# Altium PCB KMT1-42 rev.2.0.0.CPU.PcbDoc
Units mm, origin at the board's own origin, x right, y up, seen from the top; angles counter-clockwise.
Board outline 115 x 130 mm, 2 copper layers (Top Layer, Bottom Layer), stack 1.571 mm thick; 182 components, 138 nets, 1042 pads, 1 vias.
Unrouted connection lines stored in the file: 445.
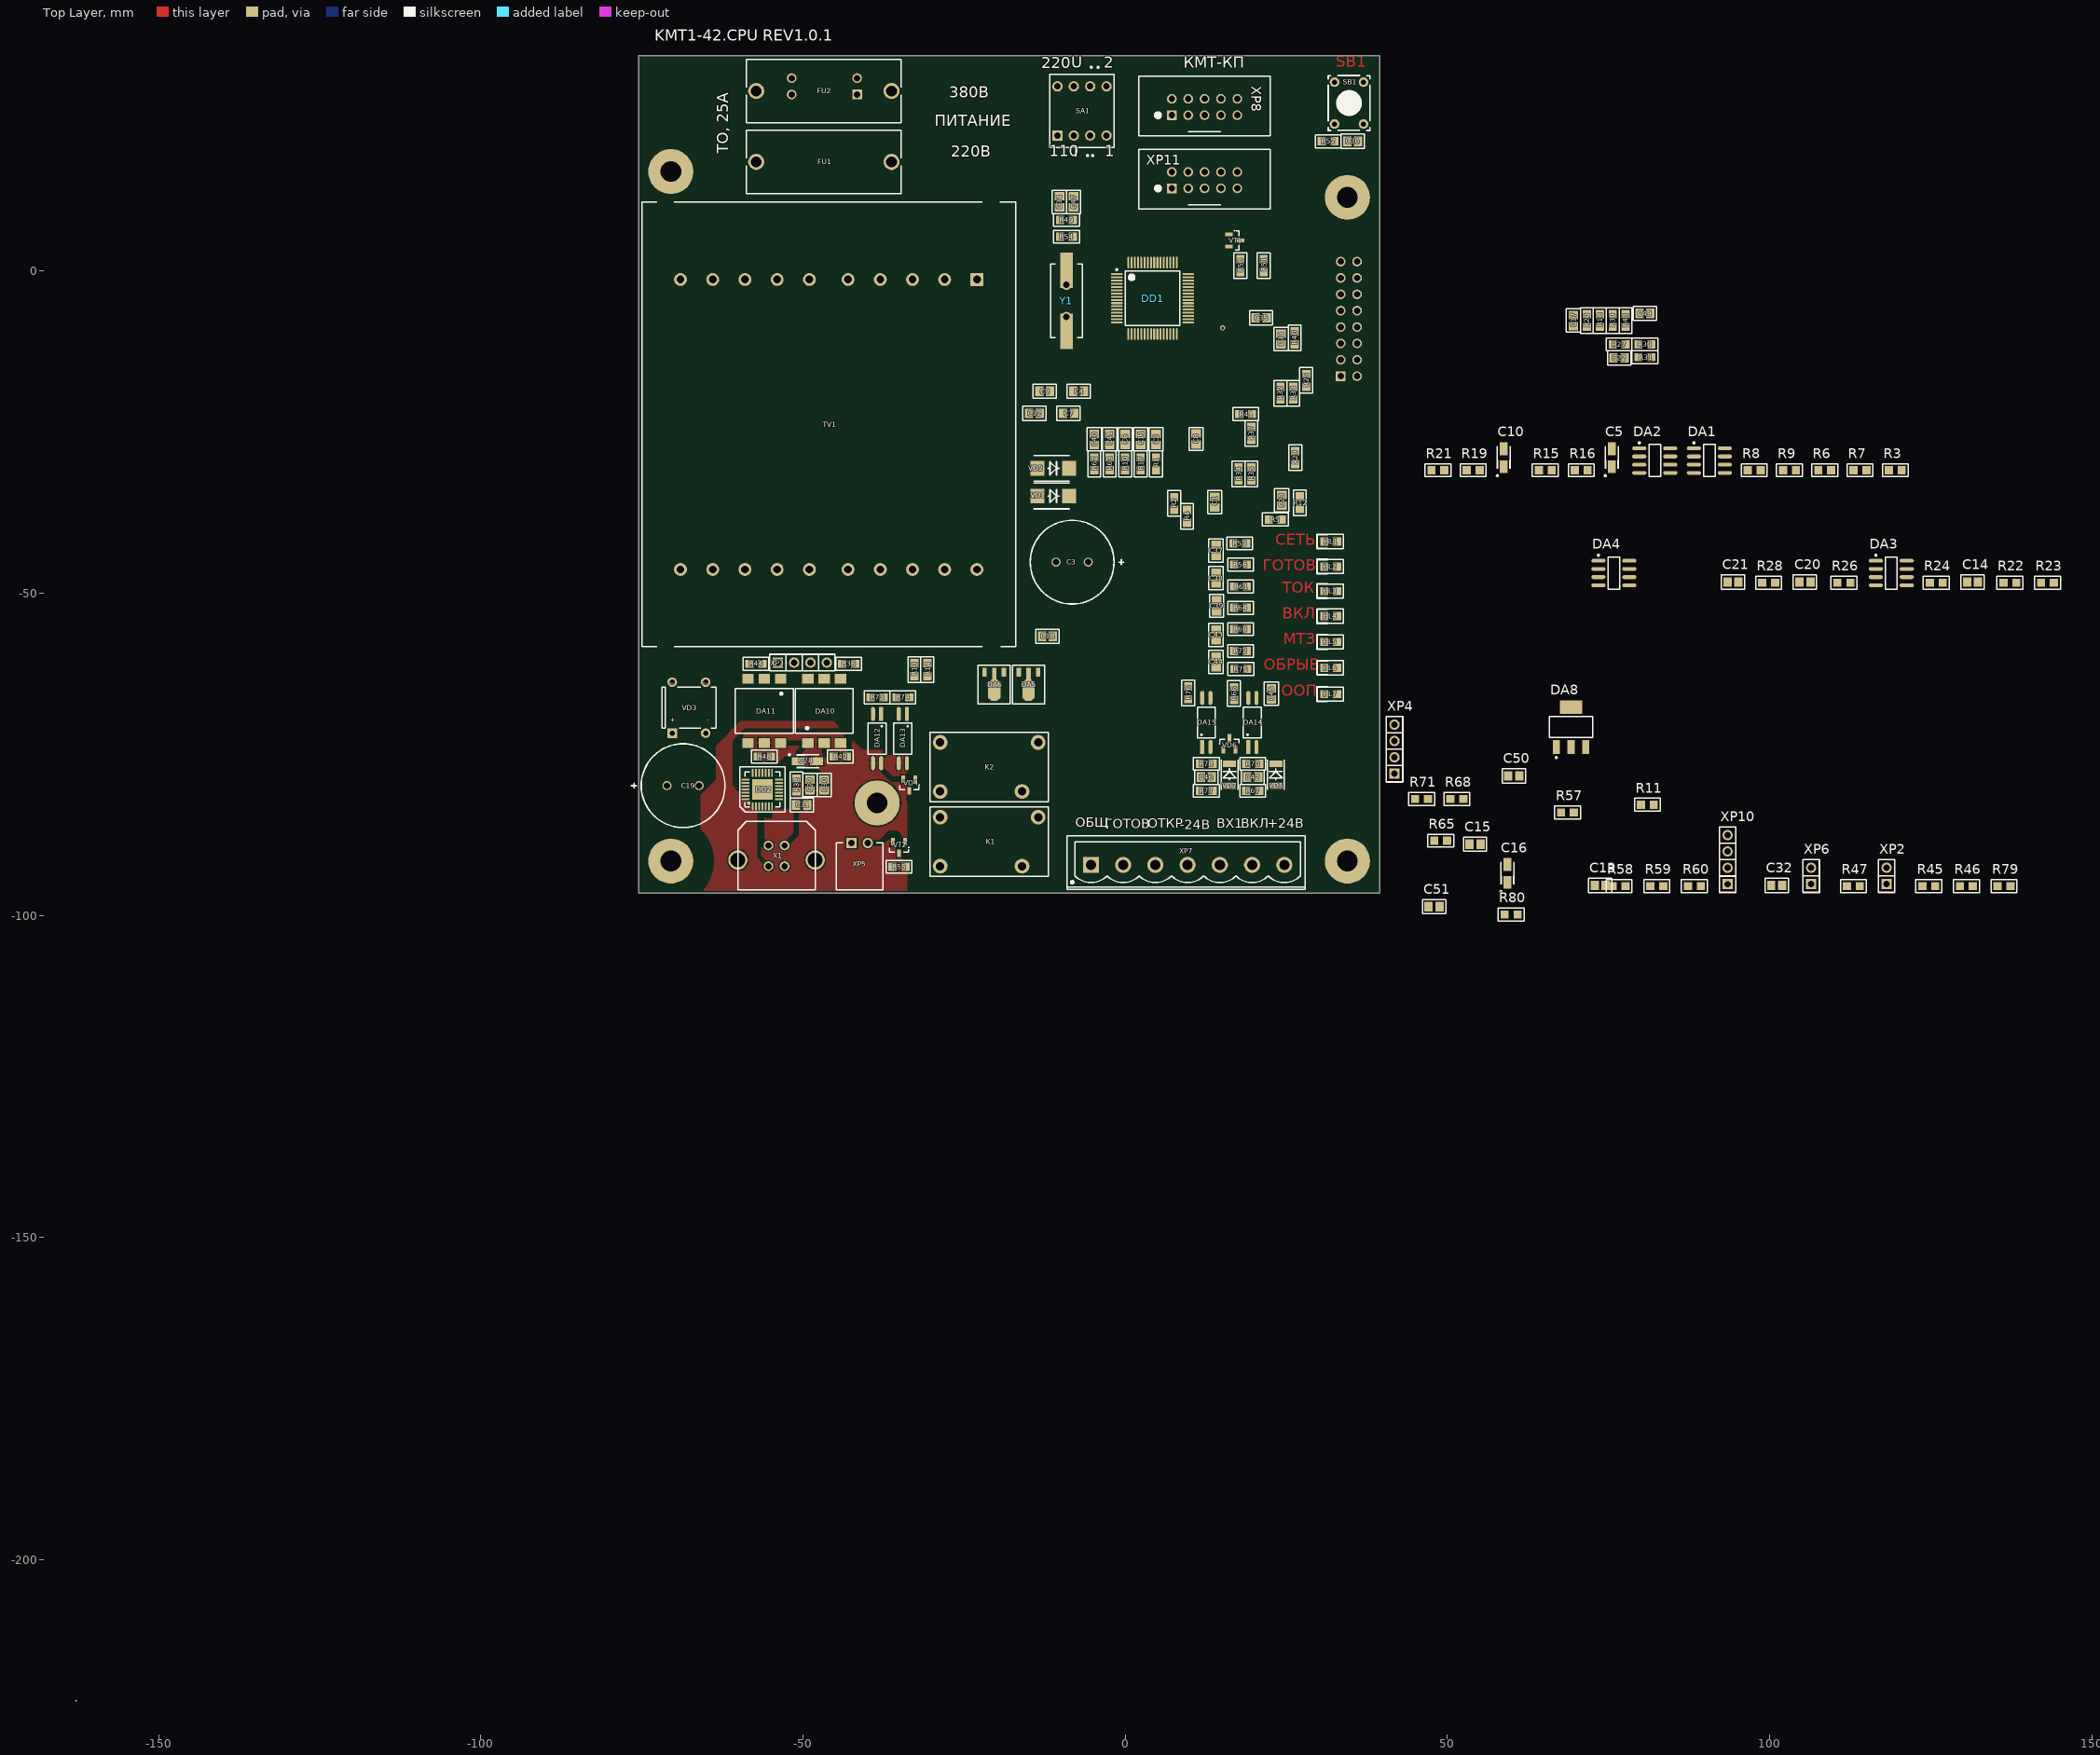
[diagram p0: Top Layer view]
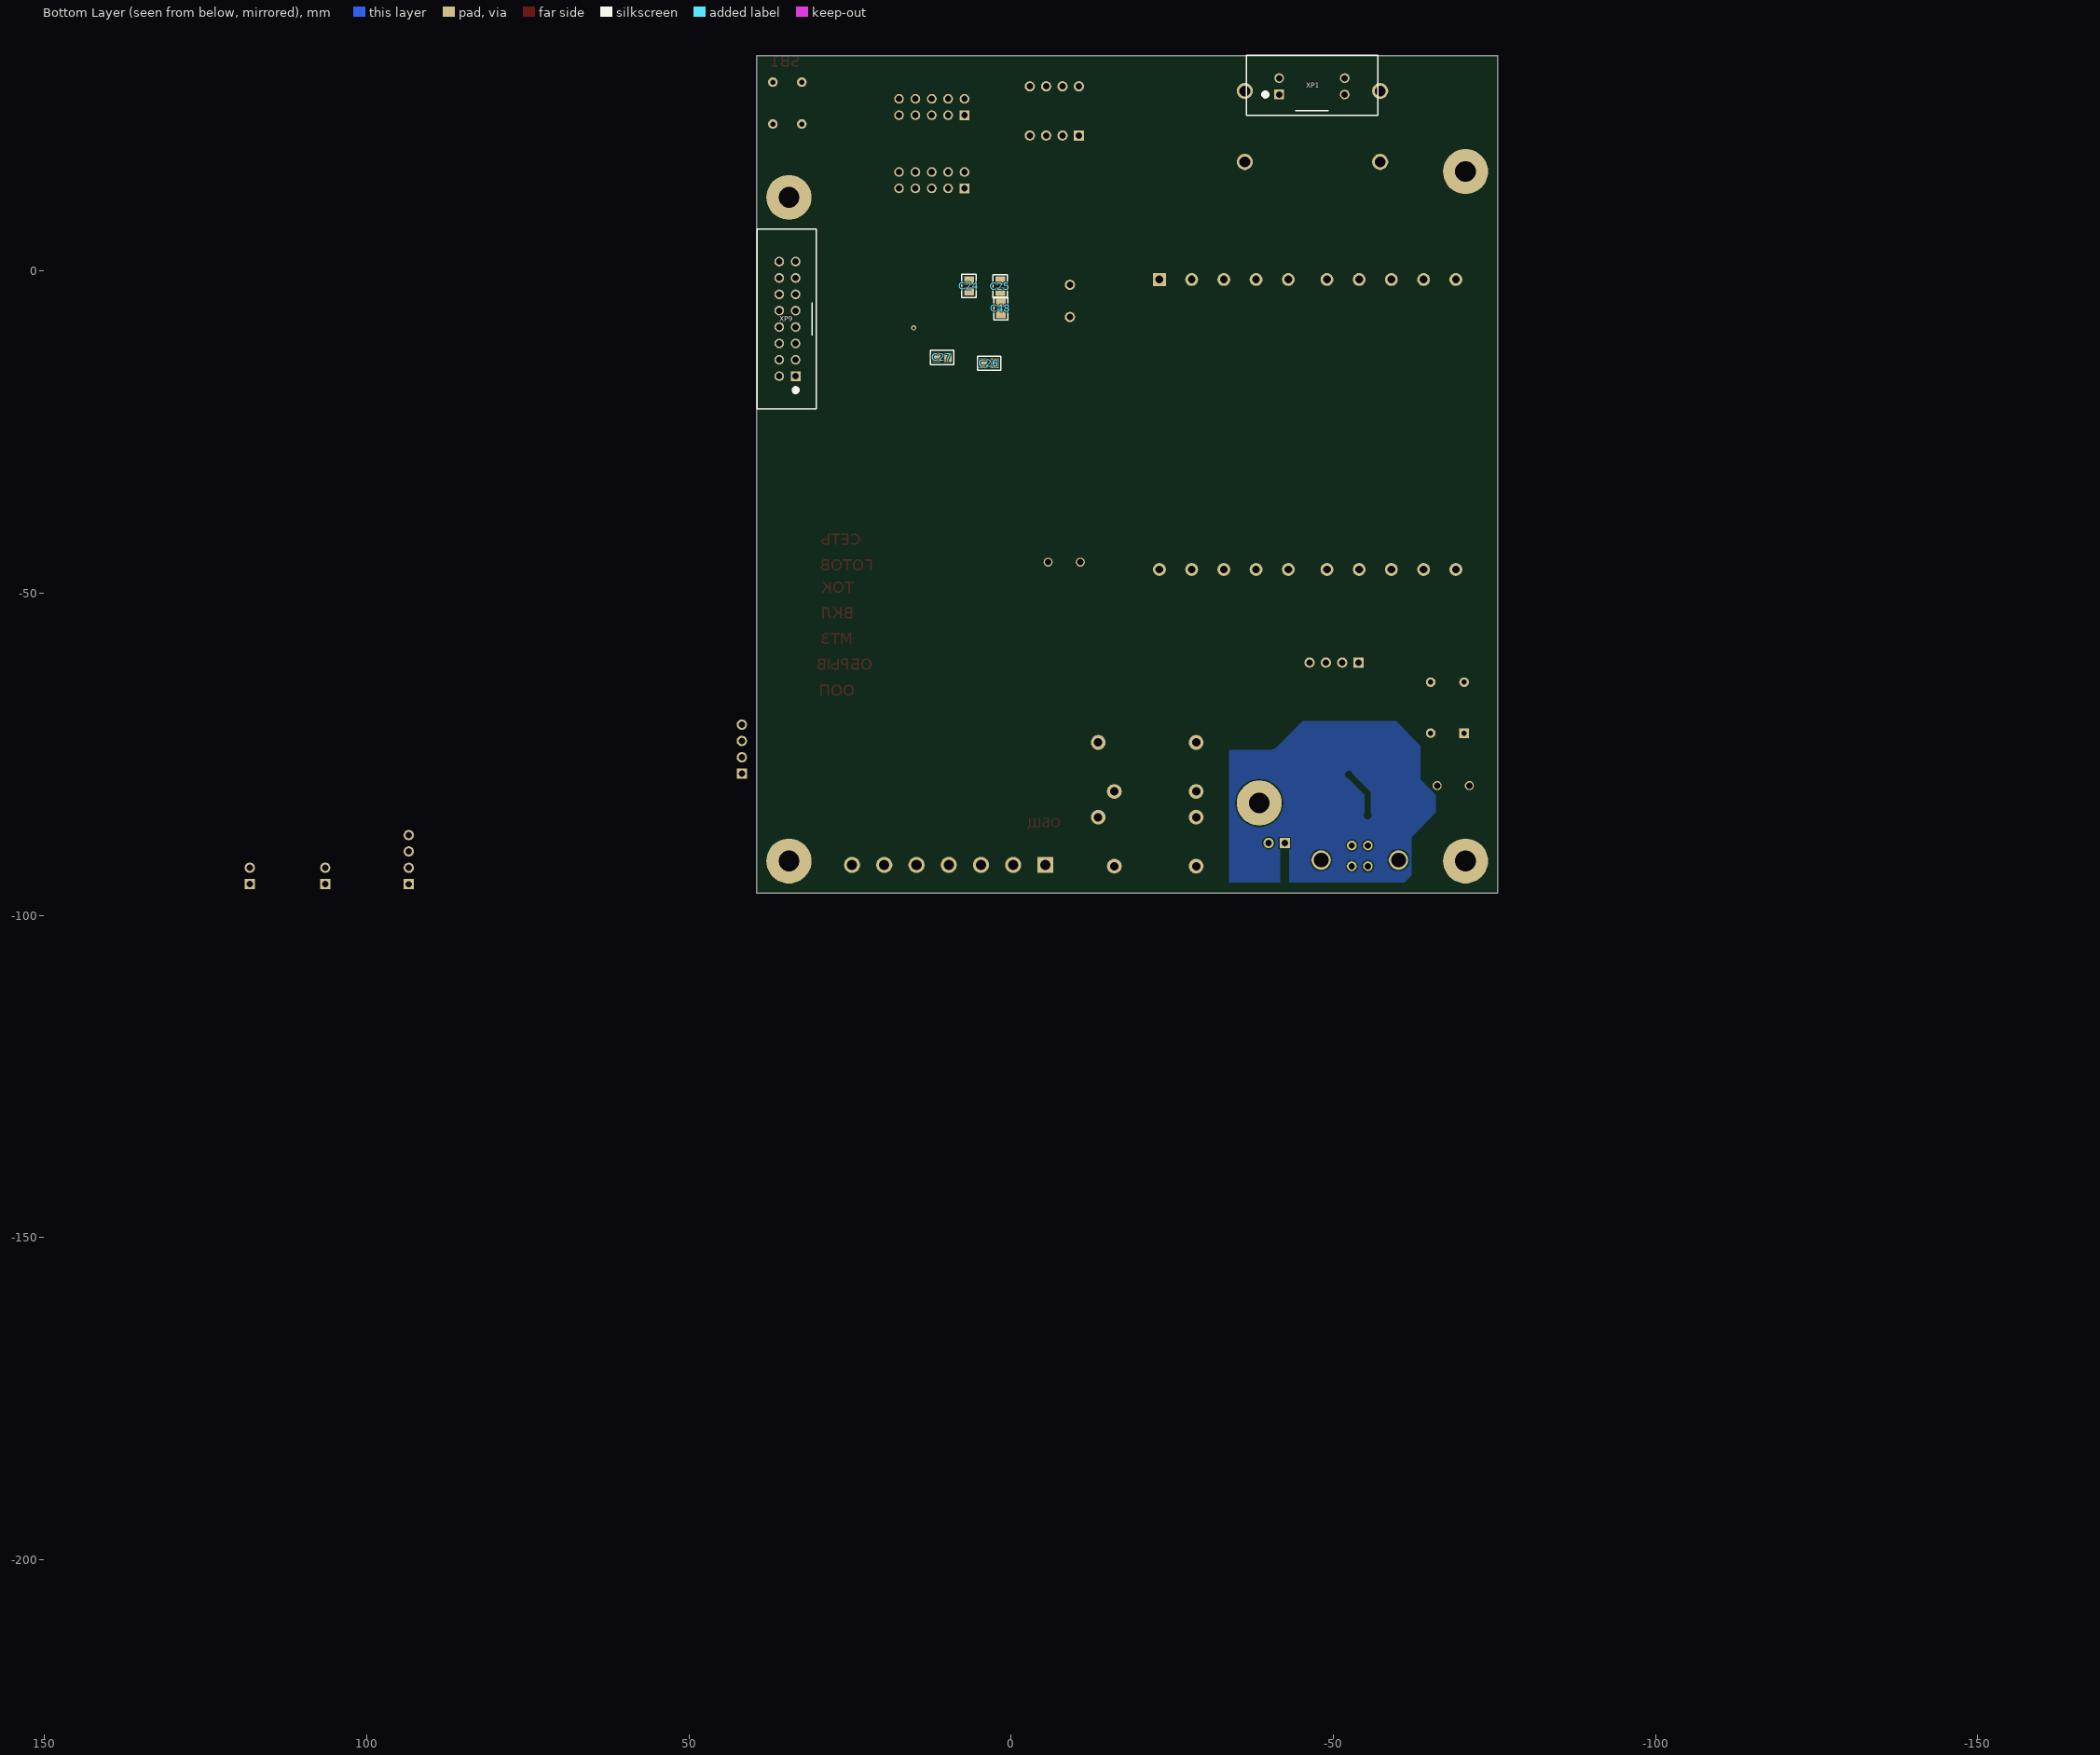
[diagram p1: Bottom Layer view, seen from below]

## Layer stack, top to bottom
Top Solder: solder mask 0.0102, Solder Resist, Dk 3.5
Top Layer: signal copper 0.0356
Dielectric1: core 1.5, FR-4, Dk 4.8
Bottom Layer: signal copper 0.0356
Bottom Solder: solder mask 0.0102, Solder Resist, Dk 3.5

## Board outline
-75.506,-96.582 -75.506,33.418 39.494,33.418 39.494,-96.582

## Design rules (kind name [scope] priority, off if disabled: settings)
Clearance Clearance_KO [OnLayer('Keep-Out Layer')] p1: gap=0.25 ignorepadtopadclearanceinfootprint=FALSE except(0: Arc-Hole Track-Hole SMDPad-Hole THPad-Hole Via-Hole Fill-Hole Poly-Hole Region-Hole Text-Hole)
Clearance Clearance_NPTH [(HoleDiameter > 0) And (PadIsPlated = 'False')] p2: gap=0.3 ignorepadtopadclearanceinfootprint=FALSE except(0: Arc-Hole Track-Hole SMDPad-Hole THPad-Hole Via-Hole Fill-Hole Poly-Hole Region-Hole Text-Hole)
Clearance [All] p3: gap=0.2 ignorepadtopadclearanceinfootprint=FALSE
Height [All] p1: minheight=0 maxheight=2500.4 prefheight=12.7
HoleSize [All] p1: absolutevalues=TRUE maxlimit=4.5 minlimit=0.4 maxpercent=80.000 minpercent=20.000
HoleToHoleClearance [All] p1: gap=0.25 allowstackedmicrovias=TRUE
MinimumSolderMaskSliver [All] p1: minsoldermaskwidth=0.1
PlaneClearance [All] p1: clearance=0.5
PlaneConnect [All] p1: planeconnectstyle=Relief reliefexpansion=0.5 reliefentries=4 reliefconductorwidth=0.2 reliefairgap=0.2
PolygonConnect PolygonConnect_via [IsVia] p1: connectstyle=Direct reliefconductorwidth=0.254 reliefentries=4 polygonreliefangle="90 Angle" airgapwidth=0.254
PolygonConnect [All] p2: connectstyle=Relief reliefconductorwidth=0.3 reliefentries=4 polygonreliefangle="90 Angle" airgapwidth=0.2
RoutingCorners [All] p1: cornerstyle=45-Degree minsetback=2.5 maxsetback=2.5
RoutingVias [All] p1: holewidth=0.4 width=0.8 viastyle="Through Hole" minholewidth=0.4 minwidth=0.8 maxholewidth=10 maxwidth=10
SilkToSolderMaskClearance SilkscreenOverComponentPads [IsPad] p1: minsilkscreentomaskgap=0.254 clearancetoexposedcopper=TRUE
SolderMaskExpansion SolderMaskExpansion_via [isvia] p1: expansion=-1 istentingtop=FALSE
SolderMaskExpansion [All] p2: expansion=0.1 istentingtop=FALSE
SupplyNets "Schematic Supply Nets" [InNet('GND')] p1: voltage=0.000
Width [All] p1: maxlimit=50 minlimit=0.2 preferedwidth=0.2
22 further rules are at their usual default settings.

## Components (designator, comment, footprint, x,y, rotation, side; value= is the part's Value field where it differs from the comment)
C1 "0.1uF" cap0805 13.894,-35.882 r270 top
C2 "0.01uF" cap0805 4.798,-26.144 r270 top
C3 "2200uF" "ECR-EHR 13mm" -8.23,-45.202 r180 top
C4 "0.1uF" cap0805 -7.205,-18.686 r0 top
C5 "*6.8uF" TC3216-1206-A 75.513,-28.984 r90 top
C6 "0.01uF" cap0805 -0.002,-26.144 r270 top
C7 "0.47uF" cap0805 -8.782,-22.102 r180 top
C8 "1000pF" cap0805 10.994,-26.082 r90 top
C9 "0.1uF" cap0805 -12.505,-18.686 r0 top
C10 "*6.8uF" TC3216-1206-A 58.762,-28.984 r90 top
C11 "1000pF" cap0805 2.398,-26.144 r270 top
C12 "0.47uF" cap0805 -14.083,-22.102 r180 top
C13 "0.1uF" cap0805 73.72,-95.363 r0 top
C14 "0.47uF" cap0805 131.517,-48.284 r0 top
C15 "0.1uF" cap0805 54.289,-88.987 r0 top
C16 "*6.8uF" TC3216-1206-A 59.319,-93.508 r90 top
C17 "1000pF" cap0805 69.559,-7.7 r270 top
C18 "2.2uF" cap0805 -12.065,-56.696 r180 top
C19 "1000uF" "ECR-EHR 13mm" -68.606,-79.882 r0 top
C20 "1000pF" cap0805 105.491,-48.284 r0 top
C21 "2.2uF" cap0805 94.316,-48.284 r0 top
C22 "1000pF" cap0805 76.659,-13.5 r0 top
C23 "0.1uF" cap0805 24.294,-35.582 r270 top
C24 "0.1uF" cap0805 6.548,-2.311 r90 bottom
C25 "0.1uF" cap0805 1.702,-2.376 r90 bottom
C26 "0.1uF" cap0805 3.437,-14.331 r0 bottom
C27 "0.1uF" cap0805 10.7,-13.422 r0 bottom
C28 "6.8uF" TC3216-1206-A -49.306,-76.082 r0 top
C29 "1uF" cap0805 -48.906,-79.782 r90 top
C30 "0.1uF" cap0805 -46.706,-79.782 r90 top
C31 "0.1uF" cap0805 -50.206,-82.882 r180 top
C32 "1000pF" cap0805 101.107,-95.375 r0 top
C33 "1000pF" cap0805 24.194,-10.582 r270 top
C34 "0.1uF" cap0805 -10.206,10.718 r270 top
C35 "1000pF" cap0805 21.094,-7.282 r180 top
C36 "0.1uF" cap0805 35.294,20.118 r180 top
C37 "0.01uF" cap0805 14.094,-43.382 r90 top
C38 "0.01uF" cap0805 14.094,-47.682 r270 top
C39 "0.1uF" cap0805 14.194,-51.982 r270 top
C40 "1000pF" cap0805 -4.802,-26.144 r270 top
C41 "1000pF" cap0805 -2.402,-26.144 r270 top
C42 "0.1uF" cap0805 19.794,-78.582 r180 top
C43 "0.01uF" cap0805 14.094,-56.482 r270 top
C44 "0.01uF" cap0805 14.094,-60.682 r270 top
C45 "0.01uF" cap0805 22.694,-65.632 r270 top
C46 "0.1uF" cap0805 12.594,-78.582 r180 top
C47 "0.1uF" cap0805 -8.006,10.718 r270 top
C48 "0.1uF" cap0805 1.596,-5.828 r270 bottom
C49 "1000pF" cap0805 80.659,-6.6 r180 top
C50 "20pF" cap0805 60.309,-78.37 r0 top
C51 "20pF" cap0805 47.939,-98.665 r0 top
DA1 "AD8602ARZ" SO-8 90.663,-29.434 r0 top
DA2 "AD8602ARZ" SO-8 82.188,-29.434 r0 top
DA3 "AD8602ARZ" SO-8 118.892,-46.884 r0 top
DA4 "AD8602ARZ" SO-8 75.84,-46.884 r0 top
DA5 "L78L05ACUTR" SOT89 -15.017,-63.684 r180 top
DA6 "L78L33ACUTR" SOT89 -20.317,-63.684 r180 top
DA8 "LM1117MP-3.3" SOT223 69.199,-70.801 r0 top
DA10 "H11L1SR2M" PDIP6 -46.706,-68.282 r0 top
DA11 "H11L1SR2M" PDIP6 -56.006,-68.282 r180 top
DA12 "PS2801-1" SOP4 -38.506,-72.582 r180 top
DA13 "PS2801-1" SOP4 -34.506,-72.582 r180 top
DA14 "PS2801-1" SOP4 19.74,-70.082 r0 top
DA15 "PS2801-1" SOP4 12.594,-70.082 r0 top
DD1 "STM32F405RGT6" LQFP64 4.25,-4.25 r0 top
DD2 "CP2103" QFN-28 -56.306,-80.482 r0 top locked
FU1 "FH101" FH101 -46.758,16.918 r0 top locked
FU2 "FH101" FH101 -46.758,27.918 r0 top locked
HL1 "KP-2012SGC" Led0805 31.894,-41.982 r180 top
HL2 "KP-2012SGC" Led0805 31.894,-45.882 r180 top
HL3 "KP-2012SYC" Led0805 31.894,-49.682 r180 top
HL4 "KP-2012SYC" Led0805 31.894,-53.582 r180 top
HL5 "KP-2012SRC" Led0805 31.894,-57.582 r180 top
HL6 "KP-2012SRC" Led0805 31.894,-61.582 r180 top
HL7 "KP-2012SRC" Led0805 31.894,-65.682 r180 top
K1 "TRC-24VDC-SC-AD" TRC-24VDC-SC-AD -28.706,-84.782 r0 top
K2 "TRC-24VDC-SC-AD" TRC-24VDC-SC-AD -28.706,-73.182 r0 top
R1 "820" res0805 4.798,-29.944 r90 top
R2 "33k" res0805 7.594,-36.082 r90 top
R3 "33k" res0805 119.515,-30.934 r0 top
R4 "4.7k" res0805 9.594,-38.082 r90 top
R5 "33k" res0805 23.294,-38.582 r0 top
R6 "20k" res0805 108.564,-30.934 r0 top
R7 "20k" res0805 114.039,-30.934 r0 top
R8 "33k" res0805 97.614,-30.934 r0 top
R9 "33k" res0805 103.089,-30.934 r0 top
R10 "820" res0805 -0.002,-29.944 r90 top
R11 "33k" res0805 81.036,-82.84 r0 top
R12 "20k" res0805 27.094,-35.982 r90 top
R13 "20k" res0805 -32.706,-61.882 r90 top
R14 "4.7k" res0805 -30.706,-61.882 r90 top
R15 "*" res0805 65.187,-30.934 r0 top
R16 "*" res0805 70.762,-30.934 r0 top
R17 "150" res0805 2.398,-29.944 r90 top
R18 "1k" res0805 73.659,-7.7 r90 top
R19 "33k" res0805 54.012,-30.934 r0 top
R20 "150" res0805 71.659,-7.7 r270 top
R21 "4.7k" res0805 48.536,-30.934 r0 top
R22 "33k" res0805 137.293,-48.384 r0 top
R23 "20k" res0805 143.143,-48.384 r0 top
R24 "33k" res0805 125.867,-48.384 r0 top
R25 "10k" res0805 28.094,-16.982 r90 top
R26 "20k" res0805 111.541,-48.384 r0 top
R27 "1k" res0805 76.659,-11.4 r180 top
R28 "4.7k" res0805 99.866,-48.384 r0 top
R29 "*" res0805 26.394,-28.982 r270 top
R30 "150" res0805 80.659,-11.4 r180 top
R31 "150" res0805 80.659,-13.4 r180 top
R32 "33k" res0805 24.094,-18.982 r90 top
R33 "4.7k" res0805 26.094,-18.982 r90 top
R34 "33k" res0805 17.587,-31.509 r270 top
R35 "20k" res0805 19.587,-31.509 r90 top
R36 "300" res0805 -42.906,-60.982 r180 top
R37 "33k" res0805 19.587,-25.209 r270 top
R38 "4.7k" res0805 -51.006,-79.782 r90 top
R39 "1k" res0805 75.659,-7.7 r90 top
R40 "10k" res0805 26.294,-10.382 r270 top
R41 "20k" res0805 18.687,-22.209 r180 top
R42 "470" res0805 -44.206,-75.382 r180 top
R43 "150" res0805 77.659,-7.7 r270 top
R44 "300" res0805 -57.306,-60.982 r180 top
R45 "*" res0805 124.708,-95.475 r0 top
R46 "*" res0805 130.558,-95.475 r0 top
R47 "4.7k" res0805 113.007,-95.475 r0 top
R48 "470" res0805 -56.006,-75.382 r0 top
R49 "10k" res0805 -9.106,7.918 r0 top
R50 "1k" res0805 17.894,0.818 r90 top
R51 "150" res0805 21.494,0.818 r90 top
R52 "2k" res0805 31.494,20.118 r180 top
R53 "1k" res0805 17.794,-42.282 r180 top
R54 "10k" res0805 -9.106,5.318 r180 top
R55 "10k" res0805 -35.106,-92.482 r0 top
R56 "1k" res0805 17.894,-45.582 r180 top
R57 "10" res0805 68.646,-84.045 r0 top
R58 "4.7k" res0805 76.656,-95.475 r0 top
R59 "4.7k" res0805 82.506,-95.475 r0 top
R60 "4.7k" res0805 88.331,-95.475 r0 top
R61 "1k" res0805 17.894,-48.982 r180 top
R62 "150" res0805 -4.802,-29.944 r90 top
R63 "150" res0805 -2.402,-29.944 r90 top
R64 "1k" res0805 17.894,-52.282 r180 top
R65 "100" res0805 48.973,-88.44 r0 top
R66 "2k" res0805 16.885,-65.582 r270 top
R67 "1k" res0805 19.794,-80.682 r0 top
R68 "100" res0805 51.478,-81.963 r0 top
R69 "1k" res0805 17.894,-55.582 r180 top
R70 "1k" res0805 19.794,-76.482 r180 top
R71 "100" res0805 46.003,-81.963 r0 top
R72 "1k" res0805 17.894,-58.982 r180 top
R73 "470" res0805 -38.506,-66.182 r180 top
R74 "470" res0805 -34.506,-66.182 r180 top
R75 "1k" res0805 17.948,-61.782 r180 top
R76 "2k" res0805 9.794,-65.482 r270 top
R77 "1k" res0805 12.594,-80.682 r0 top
R78 "1k" res0805 12.594,-76.482 r180 top
R79 "1k" res0805 136.384,-95.475 r0 top
R80 "1M" res0805 59.903,-99.884 r0 top
SA1 "SWD1-4" SWD1-4 -10.506,21.018 r0 top locked
SB1 "SWT-6" SWT-6 34.794,26.018 r270 top locked
TV1 "ТПГ18" TPG18 -46.006,-23.832 r180 top locked
VD1 "10BQ060" SMB -11.162,-34.937 r0 top
VD2 "10BQ060" SMB -11.162,-30.637 r0 top
VD3 "DF01M" DF-M -67.706,-67.782 r180 top
VD4 "BAV70" SOT23 -33.506,-79.782 r270 top
VD5 "TZMC10" SOD80 23.394,-78.182 r90 top
VD6 "BAV70" SOT23 16.194,-73.382 r90 top
VD7 "TZMC10" SOD80 16.194,-78.182 r90 top
VT1 "IRLML2803TR" SOT23 16.994,4.718 r0 top
VT2 "IRLML2803TR" SOT23 -35.106,-89.482 r270 top
X1 "M701-330442" USB_Bvert -54.106,-90.782 r0 top locked
XP1 "IDC-10" IDC-10#1 -46.676,28.648 r180 bottom locked
XP2 "PLS-2" PLS2 118.158,-93.9 r0 top
XP3 "PLS-4" PLS4 -50.106,-60.782 r270 top
XP4 "PLS-4" PLS4 41.802,-74.222 r0 top
XP5 "CWF-2R" CWF-2R -41.206,-88.782 r0 top locked
XP6 "PLS-2" PLS2 106.457,-93.9 r0 top
XP7 "2EDGVC-5-07P" 2EDGVC-5.0-7P-2 12.194,-92.182 r0 top locked
XP8 "IDC-10" IDC-10#2 12.324,25.438 r0 top locked
XP9 "IDC-16" IDC-16 34.724,-7.442 r90 bottom locked
XP10 "PLS-4" PLS4 93.481,-91.375 r0 top
XP11 "IDC-10" IDC-10#2 12.324,14.085 r0 top
Y1 "8 MHz" XT49M -9.109,-4.659 r90 top

## Footprints (in the part's own frame and the unit in brackets; to place one, negate y for a bottom-side part, rotate by r counter-clockwise, add the part's x,y. Pads: shape width x height; smd on the part's side, far side on the other; paste and mask are expansions set on the pad)
2EDGVC-5.0-7P-2 [mm]
  rect 2.5x2.5 hole 1.6: 1(-17.5,0)
  round 2.5 hole 1.6: 2(-12.5,0) 3(-7.5,0) 4(-2.5,0) 5(2.5,0) 6(7.5,0) 7(12.5,0)
  silkscreen extent -21.25,-3.8 15.75,4.5, body extent -21.25,-3.78 15.75,12.08, height 22.31
cap0805 [mm]
  rect 1.3x1.5 smd: 1(-0.85,0) 2(0.85,0)
  silkscreen extent -1.8,-1.1 1.8,1.1, body extent -1,-0.62 1,0.62, height 0.61
CWF-2R [mm]
  rect 1.6x1.6 hole 1: 1(-1.25,0)
  round 1.6 hole 1: 2(1.25,0)
  silkscreen extent -3.6,-7.3 3.6,0, body extent -3.7,-7.3 3.7,0.34, height 5.75
DF-M [mm]
  rect 1.5x1.5 hole 0.8: 1(2.6,3.95)
  round 1.5 hole 0.8: 2(-2.6,3.95) 3(-2.6,-3.95) 4(2.6,-3.95)
  silkscreen extent -4.2,-3.2 4.2,3.2, body extent -4.26,-4 4.26,4, height 4.09
"ECR-EHR 13mm" [mm]
  round 1.4 hole 1: 1(-2.5,0) 2(2.5,0)
  silkscreen extent -8,-6.5 6.5,6.5
FH101 [mm]
  round 2.5 hole 1.7: 1(-10.5,0) 2(10.5,0)
  silkscreen extent -12,-4.9 12,4.9, body extent -13.25,-4.9 13.25,4.9, height 13.41
IDC-10#1 [mm]
  rect 1.5x1.5 hole 1: 1(-5.08,-1.27)
  round 1.5 hole 1: 2(-5.08,1.27) 9(5.08,-1.27) 10(5.08,1.27)
  silkscreen extent -10.2,-4.5 10.2,4.8, body extent -10.2,-4.45 10.2,4.9, height 9.35
IDC-10#2 [mm]
  rect 1.5x1.5 hole 1: 1(-5.08,-1.27)
  round 1.5 hole 1: 2(-5.08,1.27) 3(-2.54,-1.27) 4(-2.54,1.27) 5(0,-1.27) 6(0,1.27) 7(2.54,-1.27) 8(2.54,1.27) 9(5.08,-1.27) 10(5.08,1.27)
  silkscreen extent -10.2,-4.5 10.2,4.8, body extent -10.2,-4.45 10.2,4.9, height 9.35
IDC-16 [mm]
  rect 1.5x1.5 hole 1: 1(-8.89,-1.27)
  round 1.5 hole 1: 2(-8.89,1.27) 3(-6.35,-1.27) 4(-6.35,1.27) 5(-3.81,-1.27) 6(-3.81,1.27) 7(-1.27,-1.27) 8(-1.27,1.27) 9(1.27,-1.27) 10(1.27,1.27) 11(3.81,-1.27) 12(3.81,1.27) 13(6.35,-1.27) 14(6.35,1.27) 15(8.89,-1.27) 16(8.89,1.27)
  silkscreen extent -13.97,-4.45 13.97,4.7, body extent -14,-4.4 14,4.7, height 9.3
Led0805 [mm]
  rect 1.27x1.27 smd: 1(-1,0) 2(1,0)
  silkscreen extent -2,-1.1 2.1,1.1, body extent -1.01,-0.62 1.01,0.62, height 1.11
LQFP64 [mm] "Thin QFP, 64-Leads, Body 10x10mm, Pitch 0.5mm, IPC Medium Density"
  oval 1.8x0.3 smd: 1(-5.55,3.75) 2(-5.55,3.25) 3(-5.55,2.75) 4(-5.55,2.25) 5(-5.55,1.75) 6(-5.55,1.25) 7(-5.55,0.75) 8(-5.55,0.25) 9(-5.55,-0.25) 10(-5.55,-0.75) 11(-5.55,-1.25) 12(-5.55,-1.75) 13(-5.55,-2.25) 14(-5.55,-2.75) 15(-5.55,-3.25) 16(-5.55,-3.75) 33(5.55,-3.75) 34(5.55,-3.25) 35(5.55,-2.75) 36(5.55,-2.25) 37(5.55,-1.75) 38(5.55,-1.25) 39(5.55,-0.75) 40(5.55,-0.25) 41(5.55,0.25) 42(5.55,0.75) 43(5.55,1.25) 44(5.55,1.75) 45(5.55,2.25) 46(5.55,2.75) 47(5.55,3.25) 48(5.55,3.75)
  oval 0.3x1.8 smd: 17(-3.75,-5.55) 18(-3.25,-5.55) 19(-2.75,-5.55) 20(-2.25,-5.55) 21(-1.75,-5.55) 22(-1.25,-5.55) 23(-0.75,-5.55) 24(-0.25,-5.55) 25(0.25,-5.55) 26(0.75,-5.55) 27(1.25,-5.55) 28(1.75,-5.55) 29(2.25,-5.55) 30(2.75,-5.55) 31(3.25,-5.55) 32(3.75,-5.55) 49(3.75,5.55) 50(3.25,5.55) 51(2.75,5.55) 52(2.25,5.55) 53(1.75,5.55) 54(1.25,5.55) 55(0.75,5.55) 56(0.25,5.55) 57(-0.25,5.55) 58(-0.75,5.55) 59(-1.25,5.55) 60(-1.75,5.55) 61(-2.25,5.55) 62(-2.75,5.55) 63(-3.25,5.55) 64(-3.75,5.55)
  silkscreen extent -5.67,-4.25 4.25,4.57, body extent -6,-6 6,6, height 1.6
PDIP6 [mil]
  rect 70x60 smd: 1(-100,-196.85) 2(0,-196.85) 3(100,-196.85) 4(100,196.85) 5(0,196.85) 6(-100,196.85)
  silkscreen extent -177,-138 177,138, body extent -178,-217 178,217, height 186
PLS2 [mm]
  rect 1.6x1.6 hole 1: 1(0,-1.27)
  round 1.6 hole 1: 2(0,1.27)
  silkscreen extent -1.27,-2.54 1.27,2.53, body extent -1.27,-2.54 1.27,2.54, height 8.54
PLS4 [mm]
  rect 1.6x1.6 hole 1: 1(0,-3.81)
  round 1.6 hole 1: 2(0,-1.27) 3(0,1.27) 4(0,3.81)
  silkscreen extent -1.27,-5.08 1.27,5.08, body extent -1.27,-5.08 1.27,5.08, height 8.44
QFN-28 [mil]
  rect 124.02x124.02 smd: 0(0,0)
  rect 11x48 smd: 1(-59.05,-102.36) 2(-39.37,-102.36) 3(-19.69,-102.36) 4(0,-102.36) 5(19.68,-102.36) 6(39.38,-102.36) 7(59.07,-102.36) 15(59.07,102.35) 16(39.38,102.35) 17(19.68,102.35) 18(0,102.35) 19(-19.69,102.35) 20(-39.37,102.35) 21(-59.05,102.35)
  rect 48x11 smd: 8(102.36,-59.06) 9(102.36,-39.36) 10(102.36,-19.69) 11(102.36,0) 12(102.36,19.68) 13(102.36,39.37) 14(102.36,59.06) 22(-102.35,59.06) 23(-102.35,39.37) 24(-102.35,19.68) 25(-102.35,0) 26(-102.35,-19.69) 27(-102.35,-39.36) 28(-102.35,-59.06)
  rect 19.66x19.66 smd: 29(-82.67,-82.68)
  silkscreen extent -138,-138 138,138, body extent -99,-99 99,99, height 36
res0805 [mm]
  rect 1.27x1.27 smd: 1(-1,0) 2(1,0)
  silkscreen extent -2,-1 2,1, body extent -1,-0.62 1,0.62, height 0.61
SMB [mm]
  rect 2.16x2.26 smd: 1(-2.45,0) 2(2.45,0)
  silkscreen extent -3,-2 2.5,2, body extent -3,-1.95 2.5,1.95, height 2.42
SO-8 [mm] "8-Pin Small Outline Integrated Circuit 1.27 mm Pitch, IPC Medium Density"
  oval 2.2x0.6 smd: 1(-2.4,1.905) 2(-2.4,0.635) 3(-2.4,-0.635) 4(-2.4,-1.905) 5(2.4,-1.905) 6(2.4,-0.635) 7(2.4,0.635) 8(2.4,1.905)
  silkscreen extent -2.52,-2.5 0.9,2.88, body extent -3,-2.45 3,2.45, height 1.6
SOD80 [mm]
  rect 1x2 smd: 1(-1.7,0) 2(1.7,0)
  silkscreen extent -2.3,-1.3 2.3,1.3, body extent -1.85,-0.8 1.85,0.8, height 1.6
SOP4 [mil] "SSOP4"
  rect 24.96x86 smd: 1(-25,-150)
  oval 24.96x86 smd: 2(25,-150) 3(25,150) 4(-25,150)
  silkscreen extent -55,-95 55,94, body extent -55,-138 55,138, height 83
SOT23 [mm]
  rect 1.2x0.6 smd: 1(-0.9,0.95) 2(-0.9,-0.95) 3(0.9,0)
  silkscreen extent 0,-1.5 0.7,1.53, body extent -1.25,-1.5 1.25,1.5, height 1.06
SOT89 [mm] "SOT-89; Body 4.6 x 4.25 mm, inc. leads (LxW max)"
  oct 1.9x3.3 smd: 0(0,1.388)
  rect 0.7x1.35 smd: 1(-1.5,-1.388) 3(1.5,-1.388)
  rect 0.7x1.8 smd: 2(0,-1.162)
  silkscreen extent -2.5,-2.51 2.5,3.49, body extent -2.25,-1.51 2.25,2.49, height 1.51
SOT223 [mm] "SOT-223/SC-73; 4 Leads; Body 6.7 x 7.3 mm, inc. leads (LxW max)"
  rect 1.1x2.15 smd: 1(-2.3,-3.1) 2(0,-3.1) 3(2.3,-3.1)
  rect 3.5x2.15 smd: 4(0,3.1)
  silkscreen extent -3.35,-4.85 3.35,1.63
SWD1-4 [mm]
  rect 1.6x1.6 hole 1: 1(0,0)
  round 1.6 hole 1: 2(0,7.62) 3(2.54,0) 4(2.54,7.62) 5(5.08,0) 6(5.08,7.62) 7(7.62,0) 8(7.62,7.62)
  silkscreen extent -1.19,-1.89 8.81,9.51, body extent -2.36,-1.08 9.98,8.7, height 8.15
SWT-6 [mm]
  round 1.5 hole 0.8: 1(3.213,2.201) 2(3.213,-2.299) 3(-3.287,-2.299) 4(-3.287,2.201)
  silkscreen extent -4.3,-3.3 4.21,3.2, body extent -3.76,-3.05 3.69,2.95, height 8.51
TC3216-1206-A [mm] "Capacitor, SM Tantalum; Body 3.2 x 1.6 mm (LxW typ)"
  rect 2x1.2 smd: 1(-1.4,0) 2(1.4,0)
  silkscreen extent -2.92,-1 1.7,1.12, body extent -1.6,-0.8 1.6,0.8, height 1.62
TPG18 [mm]
  rect 2x2 hole 1.2: 1(-23,-22.5)
  round 2 hole 1.2: 2(-18,-22.5) 3(-13,-22.5) 4(-8,-22.5) 5(-3,-22.5) 6(3,-22.5) 7(8,-22.5) 8(13,-22.5) 9(18,-22.5) 10(23,-22.5) 11(23,22.5) 12(18,22.5) 13(13,22.5) 14(8,22.5) 15(3,22.5) 16(-3,22.5) 17(-8,22.5) 18(-13,22.5) 19(-18,22.5) 20(-23,22.5)
  round 0 all layers, no hole: M3(-25.2,31.3)
  oval 0x6 all layers, no hole: M3(-25.2,-31.3) M3(25.2,31.3) M3(25.2,-31.3)
  silkscreen extent -29,-34.5 29,34.5, body extent -29,-34.5 29,34.5, height 28.01
TRC-24VDC-SC-AD [mm] "Реле электромагнитное"
  round 2.3 hole 1.3: 1(0,0) 2(0,-7.6) 3(15.2,0) 4(12.7,-7.6)
  silkscreen extent -1.6,-9.2 16.8,1.6
USB_Bvert [mm]
  round 1.5 hole 1: 1(1.25,1.6) 2(-1.25,1.6) 3(-1.25,-1.6) 4(1.25,-1.6)
  round 3 hole 2.3: 5(6,-0.65) 6(-6,-0.65)
  silkscreen extent -6,-5.25 6,5.35, body extent -7.35,-5.65 7.35,5.65, height 16.06
XT49M [mm]
  round 1.6 hole 1: 1(2.5,0) 2(-2.5,0)
  rect 5.5x2 smd: 1(4.75,0) 2(-4.75,0)
  silkscreen extent -5.7,-2.45 5.7,2.45

## Part data
C1 C2 C4 C6 C7 C8 C9 C11 C12 C13 C14 C15 C17 C18 C20 C21 C22 C23 C24 C25 C26 C27 C29 C30 C31 C32 C33 C34 C35 C36 C37 C38 C39 C40 C41 C42 C43 C44 C45 C46 C47 C48 C49 C50 C51: library part cap0805, "Керамический конденсатор, SMD", Package="SMD 0805", Tolerance=X7R, Voltage=25V, Group=Конденсаторы, NPads=2, Part Number=cap0805, SType=SMD
  C1 C4 C9 C13 C15 C23 C24 C25 C26 C27 C30 C31 C34 C36 C39 C42 C46 C47 C48: ValueSCH=0.1uF
  C2 C6 C37 C38 C43 C44 C45: ValueSCH=0.01uF
  C7 C12 C14: ValueSCH=0.47uF
  C8 C11 C17 C20 C22 C32 C33 C35 C40 C41 C49: ValueSCH=1000pF
  C18 C21: ValueSCH=2.2uF
  C29: ValueSCH=1uF
  C50 C51: ValueSCH=20pF
C3: library part "ECR/EHR/EXR D=13mm", "Алюминиевый конденсатор Hitano", Package=ECR/HER, Part Number="ECR/EHR/EXR D=13mm", Voltage=16V, Group=Конденсаторы, NPads=2, SType=TH, ValueSCH=2200uF
C5 C10 C16: library part capA, "Танталовый конденсатор, SMD", Package="SMD A", Group=Конденсаторы, NPads=2, Part Number=capA, SType=SMD, ValueSCH=*6.8uF
C19: library part "ECR/EHR/EXR D=13mm", "Алюминиевый конденсатор Hitano", Package=ECR/HER, Part Number="ECR/EHR/EXR D=13mm", Voltage=35V, Group=Конденсаторы, NPads=2, SType=TH, ValueSCH=1000uF
C28: library part capA, "Танталовый конденсатор, SMD", Package="SMD A", Voltage=6.3V, Group=Конденсаторы, NPads=2, Part Number=capA, SType=SMD, ValueSCH=6.8uF
DA1 DA2 DA3 DA4: "Операционный усилитель 2 в 1", Package=SO-8, Group=Микросхемы, NPads=8, Part Number=AD8602ARZ, SType=SMD, ValueSCH=AD8602ARZ
DA5: "Линейный стабилизатор 5V", Package=SOT89, Group=Микросхемы, NPads=4, Part Number=L78L05ACUTR, SType=SMD, ValueSCH=L78L05ACUTR
DA6: "Линейный стабилизатор 3.3V", Package=SOT89, Group=Микросхемы, NPads=4, Part Number=L78L33ACUTR, SType=SMD, ValueSCH=L78L33ACUTR
DA8: "Линейный стабилизатор 3.3V", Package=SOT223, Analog=SPX1117M3L-3.3, Group=Микросхемы, HelpURL=\DATA\LM1117.pdf, NPads=4, Part Number=LM1117MP-3.3, SType=SMD, ValueSCH=LM1117MP-3.3
DA10 DA11: "Оптопара 1 Мбит", Package=PDIP-6, Group=Микросхемы, NPads=6, Part Number=H11L1SR2M, SType=SMD, ValueSCH=H11L1SR2M
DA12 DA13 DA14 DA15: "Оптопара", Package=SOP4, Group=Микросхемы, NPads=4, Part Number=PS2801-1, SType=SMD, ValueSCH=PS2801-1
DD1: "Микроконтроллер 32 бит CORTEX M4", Package=LQFP64, Group=Микросхемы, NPads=64, Part Number=STM32F405RGT6, SType=SMD, ValueSCH=STM32F405RGT6
DD2: "Чип USB -> UART", Package=QFN-28, Group=Микросхемы, NPads=28, Part Number=CP2103, SType=SMD, ValueSCH=CP2103
FU1 FU2: "Держатель для предохранителей 250В 5А", Group="Держатель для предохранителей", NPads=2, Part Number=FH101, SType=TH, ValueSCH=FH101
HL1 HL2: "SMD светодиод зеленый", Package="SMD 0805", Group=Диоды, NPads=2, Part Number=KP-2012SGC, SType=SMD, ValueSCH=KP-2012SGC
HL3 HL4: "SMD светодиод желтый", Package="SMD 0805", Group=Диоды, NPads=2, Part Number=KP-2012SYC, SType=SMD, ValueSCH=KP-2012SYC
HL5 HL6 HL7: "SMD светодиод красный", Package="SMD 0805", Group=Диоды, NPads=2, Part Number=KP-2012SRC, SType=SMD, ValueSCH=KP-2012SRC
K1 K2: "Реле электромагнитное 24В 10А, 1 контакт (SPST)", Group=Переключатели, NPads=4, Part Number=TRC-24VDC-SC-AD, SType=TH, ValueSCH=TRC-24VDC-SC-AD
R1 R2 R3 R4 R5 R6 R7 R8 R9 R10 R11 R12 R13 R14 R15 R16 R17 R18 R19 R20 R21 R22 R23 R24 R25 R26 R27 R28 R29 R30 R31 R32 R33 R34 R35 R36 R37 R38 R39 R40 R41 R42 R43 R44 R45 R46 R47 R48 R49 R50 R51 R52 R53 R54 R55 R56 R57 R58 R59 R60 R61 R62 R63 R64 R65 R66 R67 R68 R69 R70 R71 R72 R73 R74 R75 R76 R77 R78 R79 R80: library part res0805, "Резистор 0.125 W, SMD", Package="SMD 0805", Group=Резисторы, NPads=2, Part Number=res0805, SType=SMD
  R1 R10: ValueSCH=820
  R2 R3 R5 R8 R9 R11 R19 R22 R24 R32 R34 R37: ValueSCH=33k
  R4 R14 R21 R28 R33 R38 R47 R58 R59 R60: ValueSCH=4.7k
  R6 R7 R12 R13 R23 R26 R35 R41: ValueSCH=20k
  R17 R20 R30 R31 R43 R51 R62 R63: ValueSCH=150
  R18 R27 R39 R50 R53 R56 R61 R64 R67 R69 R70 R72 R75 R77 R78 R79: ValueSCH=1k
  R25 R40 R49 R54 R55: ValueSCH=10k
  R36 R44: ValueSCH=300
  R42 R48 R73 R74: ValueSCH=470
  R52 R66 R76: ValueSCH=2k
  R57: ValueSCH=10
  R65 R68 R71: ValueSCH=100
  R80: ValueSCH=1M
SA1: "DIP - переключатель 4 шт.", Group=Переключатели, NPads=8, Part Number=SWD1-4, SType=TH, ValueSCH=SWD1-4
SB1: "Кнопка тактовая 6 мм х 6 мм х 8мм", Group=Контакторы, NPads=4, Part Number=SWT-6, SType=TH, ValueSCH=SWT-6
TV1: "Трансформатор ТПГ-18Вт", Group=Трансформаторы, NPads=20, Part Number=ТПГ18, SType=TH, ValueSCH=ТПГ18
VD1 VD2: "Диод шоттки 60V 1A", Package=SMB, Group=Диоды, NPads=2, Part Number=10BQ060, SType=SMD, ValueSCH=10BQ060
VD3: "Диодный мост 100V 1A", Package=DF-M, Group=Диоды, NPads=4, Part Number=DF01M, SType=TH, ValueSCH=DF01M
VD4 VD6: "Диодная сборка 2 в 1", Package=SOT23-3, Group=Диоды, NPads=3, Part Number=BAV70, SType=SMD, ValueSCH=BAV70
VD5 VD7: library part TZMC13, "Стабилитрон 10V", Package=SOD80, Group=Диоды, NPads=2, Part Number=TZMC10, SType=SMD, ValueSCH=TZMC10
VT1 VT2: "N-канальный MOSFET 30В 1.2А", Package=SOT23, Group=Транзисторы, NPads=3, Part Number=IRLML2803TR, SType=SMD, ValueSCH=IRLML2803TR
X1: "Разъём USB-B вертикальный", Group=Разъемы, NPads=6, Part Number=M701-330442, SType=TH, ValueSCH=M701-330442
XP1 XP8 XP11: "Вилка на плату 5х2 контактов шаг 2.54мм", Group=Разъемы, NPads=10, Part Number=IDC-10, SType=TH, ValueSCH=IDC-10
XP2 XP6: "Однорядный штыревой разъем 2 шаг 2.54мм", Group=Разъемы, NPads=2, Part Number=PLS-2, SType=TH, ValueSCH=PLS-2
XP3 XP4 XP10: "Однорядный штыревой разъем 4 шаг 2.54мм", Group=Разъемы, NPads=4, Part Number=PLS-4, SType=TH, ValueSCH=PLS-4
XP5: "Вилка на плату 2.50мм угловая закрытая", Analog=DS1069-2MR, Group=Разъемы, NPads=2, Part Number=CWF-2R, SType=TH, ValueSCH=CWF-2R
XP7: "Вилка на плату 7 конт. шаг 5мм", Group=Разъемы, NPads=7, Part Number=2EDGVC-5-07P, SType=TH, ValueSCH=2EDGVC-5-07P
XP9: "Вилка на плату 8х2 контактов шаг 2.54мм", Group=Разъемы, NPads=16, Part Number=IDC-16, SType=TH, ValueSCH=IDC-16
Y1: library part XT49M, "Кварцевый осциллятор", Group=Резонаторы, HelpURL=\DATA\XT49M.pdf, NPads=2, Part Number=XT49M, SType=SMD, ValueSCH="8 MHz"

## Free pads (board coordinates)
  round 7 hole 3.2 paste-2539.97: 0(-70.506,-91.582) 0(-70.506,15.418) 0(-38.506,-82.582) 0(34.494,-91.582) 0(34.494,11.418)
  round 0 on Top Overlay: 1(-162.834,-221.939) 1(-162.834,-221.939) 1(-162.834,-221.938) 1(-162.834,-221.938) 1(-162.834,-221.937) 1(-162.834,-221.936) 1(-162.834,-221.935) 1(-162.834,-221.935) 1(-162.834,-221.934) 1(-162.834,-221.933) 1(-162.834,-221.933) 1(-162.834,-221.932) 1(-162.834,-221.931) 1(-162.834,-221.931) 1(-162.834,-221.93) 1(-162.834,-221.929) 1(-162.834,-221.928) 1(-162.834,-221.928) 1(-162.834,-221.927) 1(-162.834,-221.926) 1(-162.834,-221.926) 1(-162.834,-221.926) 1(-162.834,-221.938) 1(-162.834,-221.937) 1(-162.834,-221.937) 1(-162.833,-221.937) 1(-162.833,-221.937) 1(-162.833,-221.937) 1(-162.833,-221.937) 1(-162.833,-221.937) 1(-162.833,-221.937) 1(-162.833,-221.937) 1(-162.833,-221.937) 1(-162.833,-221.937) 1(-162.833,-221.937) 1(-162.833,-221.936) 1(-162.833,-221.937) 1(-162.833,-221.938) 1(-162.833,-221.935) 1(-162.832,-221.937) 1(-162.832,-221.934) 1(-162.832,-221.937) 1(-162.832,-221.937) 1(-162.832,-221.933) 1(-162.831,-221.926) 1(-162.831,-221.932) 1(-162.831,-221.932) 1(-162.831,-221.926) 1(-162.831,-221.937) 1(-162.831,-221.931) 1(-162.83,-221.931) 1(-162.83,-221.926) 1(-162.83,-221.93) 1(-162.829,-221.926) 1(-162.829,-221.929) 1(-162.829,-221.929) 1(-162.829,-221.926) 1(-162.828,-221.927) 1(-162.828,-221.926) 1(-162.828,-221.927) 1(-162.828,-221.927) 1(-162.828,-221.926) 1(-162.828,-221.926) 1(-162.828,-221.926) 1(-162.828,-221.926) 1(-162.828,-221.926) 1(-162.828,-221.926) 1(-162.828,-221.926) 1(-162.828,-221.926) 1(-162.828,-221.926) 1(-162.828,-221.926) 1(-162.828,-221.926) 1(-162.828,-221.926) 1(-162.828,-221.926) 1(-162.828,-221.926) 1(-162.828,-221.926) 1(-162.828,-221.926) 1(-162.828,-221.926) 1(-162.828,-221.926) 1(-162.828,-221.927) 1(-162.828,-221.927) 1(-162.828,-221.927) 1(-162.828,-221.927) 1(-162.828,-221.927) 1(-162.828,-221.927) 1(-162.828,-221.937) 1(-162.827,-221.928) 1(-162.826,-221.937) 1(-162.826,-221.929) 1(-162.826,-221.937) 1(-162.825,-221.931) 1(-162.825,-221.926) 1(-162.825,-221.938) 1(-162.825,-221.937) 1(-162.825,-221.932) 1(-162.824,-221.926) 1(-162.824,-221.948) 1(-162.824,-221.948) 1(-162.824,-221.939) 1(-162.824,-221.939) 1(-162.824,-221.934) 1(-162.824,-221.948) 1(-162.824,-221.94) 1(-162.824,-221.926) 1(-162.824,-221.934) 1(-162.824,-221.937) 1(-162.824,-221.948) 1(-162.823,-221.935) 1(-162.823,-221.94) 1(-162.823,-221.947) 1(-162.823,-221.948) 1(-162.823,-221.926) 1(-162.823,-221.935) 1(-162.823,-221.946) 1(-162.823,-221.942) 1(-162.823,-221.942) 1(-162.823,-221.945) 1(-162.822,-221.945) 1(-162.822,-221.936) 1(-162.822,-221.944) 1(-162.822,-221.944) 1(-162.822,-221.944) 1(-162.822,-221.937) 1(-162.822,-221.937) 1(-162.822,-221.926) 1(-162.822,-221.937) 1(-162.822,-221.937) 1(-162.822,-221.937) 1(-162.822,-221.937) 1(-162.822,-221.937) 1(-162.822,-221.937) 1(-162.822,-221.937) 1(-162.822,-221.937) 1(-162.822,-221.937) 1(-162.822,-221.937) 1(-162.822,-221.948) 1(-162.822,-221.941) 1(-162.822,-221.941) 1(-162.822,-221.941) 1(-162.822,-221.94) 1(-162.822,-221.94) 1(-162.822,-221.939) 1(-162.822,-221.938) 1(-162.822,-221.937) 1(-162.822,-221.937) 1(-162.822,-221.937) 1(-162.822,-221.936) 1(-162.822,-221.936) 1(-162.822,-221.935) 1(-162.822,-221.934) 1(-162.822,-221.933) 1(-162.822,-221.933) 1(-162.822,-221.932) 1(-162.822,-221.931) 1(-162.822,-221.931) 1(-162.822,-221.931) 1(-162.822,-221.941) 1(-162.822,-221.941) 1(-162.822,-221.948) 1(-162.822,-221.926) 1(-162.821,-221.931) 1(-162.821,-221.941) 1(-162.82,-221.948) 1(-162.82,-221.931) 1(-162.82,-221.931) 1(-162.819,-221.948) 1(-162.819,-221.941) 1(-162.819,-221.941) 1(-162.819,-221.941) 1(-162.819,-221.941) 1(-162.819,-221.941) 1(-162.819,-221.932) 1(-162.819,-221.932) 1(-162.819,-221.932) 1(-162.819,-221.932) 1(-162.819,-221.931) 1(-162.819,-221.931) 1(-162.819,-221.941) 1(-162.819,-221.941) 1(-162.819,-221.94) 1(-162.819,-221.94) 1(-162.819,-221.939) 1(-162.819,-221.939) 1(-162.819,-221.937) 1(-162.819,-221.937) 1(-162.819,-221.936) 1(-162.819,-221.936) 1(-162.819,-221.934) 1(-162.819,-221.934) 1(-162.819,-221.934) 1(-162.819,-221.933) 1(-162.819,-221.933) 1(-162.819,-221.932) 1(-162.819,-221.932) 1(-162.819,-221.948) 1(-162.818,-221.926) 1(-162.818,-221.931) 1(-162.818,-221.943) 1(-162.817,-221.932) 1(-162.817,-221.942) 1(-162.817,-221.931) 1(-162.817,-221.926) 1(-162.817,-221.932) 1(-162.817,-221.932) 1(-162.817,-221.944) 1(-162.817,-221.941) 1(-162.817,-221.935) 1(-162.817,-221.935) 1(-162.817,-221.935) 1(-162.817,-221.935) 1(-162.817,-221.935) 1(-162.817,-221.935) 1(-162.817,-221.926) 1(-162.817,-221.93) 1(-162.817,-221.948) 1(-162.816,-221.948) 1(-162.816,-221.936) 1(-162.816,-221.944) 1(-162.816,-221.944) 1(-162.816,-221.926) 1(-162.816,-221.944) 1(-162.816,-221.93) 1(-162.816,-221.941) 1(-162.815,-221.926) 1(-162.815,-221.93) 1(-162.815,-221.93) 1(-162.815,-221.941) 1(-162.815,-221.948) 1(-162.815,-221.937) 1(-162.815,-221.932) 1(-162.815,-221.934) 1(-162.815,-221.926) 1(-162.814,-221.945) 1(-162.814,-221.931) 1(-162.814,-221.942) 1(-162.814,-221.942) 1(-162.814,-221.942) 1(-162.814,-221.942) 1(-162.814,-221.931) 1(-162.814,-221.931) 1(-162.814,-221.938) 1(-162.814,-221.935) 1(-162.814,-221.948) 1(-162.814,-221.948) 1(-162.814,-221.948) 1(-162.814,-221.947) 1(-162.814,-221.947) 1(-162.814,-221.946) 1(-162.814,-221.946) 1(-162.814,-221.946) 1(-162.814,-221.943) 1(-162.813,-221.938) 1(-162.812,-221.939) 1(-162.812,-221.936) 1(-162.812,-221.945) 1(-162.812,-221.945) 1(-162.812,-221.945) 1(-162.812,-221.945) 1(-162.812,-221.94) 1(-162.812,-221.945) 1(-162.812,-221.948) 1(-162.812,-221.948) 1(-162.812,-221.948) 1(-162.812,-221.947) 1(-162.812,-221.947) 1(-162.812,-221.946) 1(-162.812,-221.946) 1(-162.812,-221.946) 1(-162.812,-221.946) 1(-162.812,-221.937) 1(-162.812,-221.926) 1(-162.812,-221.932) 1(-162.812,-221.929) 1(-162.812,-221.929) 1(-162.812,-221.93) 1(-162.811,-221.932) 1(-162.811,-221.931) 1(-162.811,-221.94) 1(-162.811,-221.928) 1(-162.811,-221.926) 1(-162.811,-221.926) 1(-162.811,-221.948) 1(-162.811,-221.933) 1(-162.811,-221.93) 1(-162.811,-221.933) 1(-162.81,-221.93) 1(-162.81,-221.948) 1(-162.81,-221.938) 1(-162.81,-221.926) 1(-162.81,-221.931) 1(-162.81,-221.933) 1(-162.81,-221.926) 1(-162.81,-221.939) 1(-162.809,-221.948) 1(-162.809,-221.932) 1(-162.809,-221.932) 1(-162.809,-221.929) 1(-162.809,-221.948) 1(-162.809,-221.943) 1(-162.809,-221.94) 1(-162.809,-221.926) 1(-162.808,-221.926) 1(-162.807,-221.941) 1(-162.807,-221.926) 1(-162.807,-221.942) 1(-162.807,-221.942) 1(-162.807,-221.948) 1(-162.807,-221.948) 1(-162.807,-221.948) 1(-162.807,-221.947) 1(-162.807,-221.947) 1(-162.807,-221.946) 1(-162.807,-221.945) 1(-162.807,-221.945) 1(-162.807,-221.944) 1(-162.807,-221.943) 1(-162.807,-221.943) 1(-162.807,-221.942) 1(-162.807,-221.942) 1(-162.807,-221.942) 1(-162.807,-221.948) 1(-162.806,-221.948) 1(-162.805,-221.948) 1(-162.805,-221.926) 1(-162.804,-221.926) 1(-162.804,-221.948) 1(-162.803,-221.948) 1(-162.803,-221.926) 1(-162.803,-221.926) 1(-162.802,-221.948) 1(-162.802,-221.948) 1(-162.801,-221.928) 1(-162.801,-221.928) 1(-162.801,-221.928) 1(-162.8,-221.926) 1(-162.8,-221.928) 1(-162.8,-221.928) 1(-162.8,-221.928) 1(-162.799,-221.926) 1(-162.798,-221.926) 1(-162.798,-221.948) 1(-162.798,-221.948) 1(-162.798,-221.926) 1(-162.798,-221.926) 1(-162.797,-221.926) 1(-162.797,-221.948) 1(-162.796,-221.943) 1(-162.796,-221.943) 1(-162.796,-221.93) 1(-162.796,-221.948) 1(-162.796,-221.926) 1(-162.796,-221.948) 1(-162.796,-221.948) 1(-162.796,-221.948) 1(-162.796,-221.948) 1(-162.796,-221.947) 1(-162.796,-221.946) 1(-162.796,-221.945) 1(-162.796,-221.945) 1(-162.796,-221.944) 1(-162.796,-221.943) 1(-162.796,-221.943) 1(-162.795,-221.93) 1(-162.794,-221.941) 1(-162.794,-221.941) 1(-162.794,-221.933) 1(-162.794,-221.948) 1(-162.794,-221.948) 1(-162.794,-221.948) 1(-162.794,-221.947) 1(-162.794,-221.947) 1(-162.794,-221.946) 1(-162.794,-221.945) 1(-162.794,-221.945) 1(-162.794,-221.944) 1(-162.794,-221.943) 1(-162.794,-221.943) 1(-162.794,-221.941) 1(-162.794,-221.943) 1(-162.794,-221.943) 1(-162.793,-221.931) 1(-162.793,-221.926) 1(-162.793,-221.948) 1(-162.791,-221.926) 1(-162.791,-221.948) 1(-162.791,-221.948) 1(-162.79,-221.926) 1(-162.79,-221.926) 1(-162.789,-221.948) 1(-162.789,-221.944) 1(-162.789,-221.944) 1(-162.789,-221.944) 1(-162.789,-221.93) 1(-162.789,-221.93) 1(-162.789,-221.93) 1(-162.788,-221.948) 1(-162.788,-221.948) 1(-162.787,-221.944) 1(-162.786,-221.926) 1(-162.786,-221.93) 1(-162.786,-221.944) 1(-162.786,-221.93) 1(-162.786,-221.926) 1(-162.785,-221.948) 1(-162.785,-221.948) 1(-162.785,-221.948) 1(-162.785,-221.948) 1(-162.785,-221.948) 1(-162.785,-221.926) 1(-162.785,-221.93) 1(-162.784,-221.944) 1(-162.784,-221.93) 1(-162.784,-221.926) 1(-162.783,-221.926) 1(-162.783,-221.93) 1(-162.783,-221.944) 1(-162.783,-221.946) 1(-162.781,-221.946) 1(-162.781,-221.946) 1(-162.78,-221.944) 1(-162.78,-221.944) 1(-162.78,-221.93) 1(-162.78,-221.926) 1(-162.779,-221.945) 1(-162.779,-221.944) 1(-162.779,-221.93) 1(-162.778,-221.926) 1(-162.778,-221.946) 1(-162.778,-221.946) 1(-162.778,-221.946) 1(-162.778,-221.944) 1(-162.778,-221.944) 1(-162.778,-221.944) 1(-162.778,-221.93) 1(-162.778,-221.93) 1(-162.778,-221.93) 1(-162.778,-221.926) 1(-162.778,-221.944) 1(-162.778,-221.944) 1(-162.778,-221.944) 1(-162.778,-221.93) 1(-162.778,-221.93) 1(-162.778,-221.93) 1(-162.778,-221.944) 1(-162.777,-221.926)
  round 0.002 on Top Overlay: 1(-162.811,-221.932) 1(-162.811,-221.929)
  round 0.003 on Top Overlay: 1(-162.795,-221.931)

## Via types
v1: diameter 0.8, hole 0.4, Top Layer to Bottom Layer, 1 vias

## Nets (pads, with @x,y where several pads share a name; then routed paths per layer and width w, separated by ;. In a path a pad name is that pad's centre, name@x,y a point inside that pad or via, vN(x,y) a via of type N, cw(c..) or ccw(c..) an arc to the next point about the centre after c; other vN are vias at no path point)
+3.3V: C15.2 C16.1 C24.2 C25.2 C26.2 C27.2 DA8.2 DA8.4 DD1.1 DD1.19 DD1.32 DD1.48 DD1.64 R49.2 XP6.2 XP11.4
+3.3VA: C9.2 C10.1 C48.2 DA6.1 DD1.13
+5V: C1.2 C4.2 C5.1 C13.2 C23.2 C47.2 DA1.8 DA2.8 DA3.8 DA4.8 DA5.1 DA10.6 DA12.1 DA13.1 HL1.1 HL2.1 HL3.1 HL4.1 HL5.1 HL6.1 HL7.1 R2.1 R3.1 R4.1 R18.2 R19.1 R21.1 R27.2 R32.1 R33.1 R36.2 R39.2 R44.2 R50.2 R52.2 R57.1 R58.1 R59.1 R60.1 R66.2 R76.2 R79.2 XP3.1 XP4.1 XP9.3 XP9.5 XP10.4 XP11.2
+5VUSB: C31.2 DD2.7 DD2.8 X1.1
+10V: C3.1 C7.2 C12.2 C14.2 DA5.3 DA6.3 DA8.3 VD1.2 VD2.2 XP9.15
+24V: C19.1 K1.1 K2.1 VD3.1 VD4.3 XP5.1 XP7.7 XP9.2
ADD: R77.2 XP7.5
B1: R1.1 XP9.7
B1O: C2.2 DD1.25 R1.2
Boot: DD1.60 R54.2 XP6.1
C2D: DD1.2 R75.2
CLA: C35.2 DD1.20 R50.1 R51.2
CLF: C32.2 DD1.27 R39.1 R43.2
CLK: XP9.11
CLKA: R51.1
CLKF: R43.1 R65.1
CMD_Screen: XP11.5
CNTRL: R67.2 XP7.6
COM: K1.4 K2.4 XP7.1
CS: R17.1 XP9.10
CS0: C11.2 R17.2
CS1: C17.2 DD1.26 R18.1 R20.2
CSNV: R20.1
DAT_A: C22.2 DD1.28 R31.2 R79.1
DAT_F: C49.2 DD1.55 R27.1 R30.2
DATA: R31.1 XP9.12
DI1: C39.1 DA14.4 DD1.51 R64.2 R66.1
DI2: DA15.4 DD1.15 R76.1
DO1: C37.1 DD1.24 R56.2 R73.1
DO2: C38.1 DD1.11 R61.2 R74.1
DTIN: R25.2 R40.2 XP9.6
DTNV: R30.1 R68.1
FAN: C42.2 DA14.1 R55.2 R67.1 R70.2 VT2.1
FRCS: DD1.40 R71.1
GND: C1.1 C2.1 C3.2 C4.1 C5.2 C6.1 C7.1 C8.1 C9.1 C10.2 C11.1 C12.1 C13.1 C14.1 C15.1 C16.2 C17.1 C18.1 C20.1 C21.1 C22.1 C23.1 C24.1 C25.1 C26.1 C27.1 C32.1 C33.1 C34.1 C35.1 C36.1 C37.2 C38.2 C39.2 C40.1 C41.1 C43.2 C44.2 C45.2 C47.1 C48.1 C49.1 C50.2 C51.2 DA1.4 DA2.4 DA2.5 DA3.4 DA4.4 DA5.0 DA5.2 DA6.0 DA6.2 DA8.1 DA10.5 DA14.3 DA15.3 DD1.12 DD1.18 DD1.63 R14.2 R15.1 R16.1 R28.2 R29.1 R46.1 R47.2 R53.2 R54.1 SA1.1 SA1.3 SA1.5 SA1.7 SB1.1 TV1.13 TV1.18 VT1.2 XP2.1 XP3.4 XP4.4 XP8.1 XP8.10 XP9.8 XP9.9 XP10.1 XP11.6 XP11.8 XP11.10
  other v1: 15.138,-8.865
GND1: C19.2 C28.2 C29.1 C30.1 C31.1 DA11.5 DA12.3 DA13.3 DD2.0 DD2.2 DD2.29 R55.1 VD3.2 VD6.3 VT2.2 X1.4 X1.5 X1.6 XP7.4 XP9.1 XP9.4
I2C_SCL: DD1.58 XP11.7
I2C_SDA: DD1.59 XP11.9
Io: C33.2 DA4.7 R35.1
Iomax: C20.2 DA3.7 R23.1
LED1: C43.1 DD1.52 R69.2
LED2: C44.1 DD1.53 R72.2
MSR: R10.1 XP9.13
MSRO: C6.2 DD1.39 R10.2
NetC18_2: C18.2 DD1.31
NetC21_2: C21.2 DD1.47
NetC28_1: C28.1 C29.2 C30.2 DA10.1 DA11.6 DD2.5 DD2.6 R38.2 R48.2
NetC42_1: C42.1 VD5.1 VD6.2
NetC45_1: C45.1 HL7.2 R75.1
NetC46_1: C46.1 VD6.1 VD7.1
NetC46_2: C46.2 DA15.1 R77.1 R78.2
NetC50_1: C50.1 R80.2 Y1.2
NetC51_1: C51.1 R80.1 Y1.1
NetDA1_1: DA1.1 R5.1 R12.2
NetDA1_2: DA1.2 R5.2 R11.2
NetDA1_3: DA1.3 R4.2 R14.1
NetDA1_5: DA1.5 R8.2 R15.2
NetDA1_6: DA1.6 R6.2 R12.1
NetDA1_7: DA1.7 R6.1 R13.2
NetDA2_2: DA2.2 R7.2 R13.1
NetDA2_3: DA2.3 R9.2 R16.2
NetDA2_6: DA2.6 DA2.7
NetDA3_1: DA3.1 R22.1 R26.2
NetDA3_2: DA3.2 R22.2 R25.1
NetDA3_3: DA3.3 R21.2 R28.1
NetDA3_5: DA3.5 R24.2 R29.2
NetDA3_6: DA3.6 R23.2 R26.1
NetDA4_1: DA4.1 R34.1 R41.2
NetDA4_2: DA4.2 R34.2 R40.1
NetDA4_3: DA4.3 R33.2 R47.1
NetDA4_5: DA4.5 R37.2 R46.2
NetDA4_6: DA4.6 R35.2 R41.1 R45.2
NetDA10_2: DA10.2 R42.2
NetDA11_1: DA11.1 R44.1
NetDA11_4: DA11.4 DD2.24 R48.1
NetDA12_2: DA12.2 R73.2
NetDA12_4: DA12.4 K1.2 VD4.2
NetDA13_2: DA13.2 R74.2
NetDA13_4: DA13.4 K2.2 VD4.1
NetDA14_2: DA14.2 R70.1 VD5.2
NetDA15_2: DA15.2 R78.1 VD7.2
NetDD2_9: DD2.9 R38.1
NetDD2_25: DD2.25 R42.1
NetFU1_1: FU1.1 TV1.7
NetFU1_2: FU1.2 TV1.2
NetFU2_1: FU2.1 TV1.6
NetFU2_2: FU2.2 TV1.1
NetHL1_2: HL1.2 R53.1
NetHL2_2: HL2.2 R56.1
NetHL3_2: HL3.2 R61.1
NetHL4_2: HL4.2 R64.1
NetHL5_2: HL5.2 R69.1
NetHL6_2: HL6.2 R72.1
NetR2_2: R2.2 R8.1
NetR3_2: R3.2 R9.1
NetR19_2: R19.2 R24.1
NetR32_2: R32.2 R37.1
NetR45_1: R45.1 VT1.3
NetR57_2: R57.2 XP8.2 XP8.9
NetR58_2: R58.2 R65.2 XP8.3 XP8.8
NetR59_2: R59.2 R68.2 XP8.5 XP8.6
NetR60_2: R60.2 R71.2 XP8.4 XP8.7
NetTV1_4: TV1.4 XP1.1 XP1.2
NetTV1_9: TV1.9 XP1.9 XP1.10
NetTV1_11: TV1.11 VD3.4
NetTV1_12: TV1.12 TV1.17
NetTV1_14: TV1.14 VD2.1
NetTV1_16: TV1.16 VD3.3
NetTV1_19: TV1.19 VD1.1
NetVT2_3: VT2.3 XP5.2
Reset: C34.2 DD1.7 R49.1 XP2.2
RG: K1.3 XP7.2
RK: K2.3 XP7.3
Rng: VT1.1
RX1: DD1.43 XP3.3
RX2: DA10.4 DD1.17 R36.1 XP4.3
RX3: DD1.30
S0: DD1.3 SA1.2
S1: DD1.4 SA1.4
S2: DD1.33 SA1.6
S3: DD1.34 SA1.8
S4: C36.2 DD1.22 DD1.35 R52.1 SB1.2
SC1: R63.1 XP9.16
SC2: R62.1 XP9.14
SC_1: C41.2 DD1.37 DD1.44 R63.2
SC_2: C40.2 DD1.38 DD1.45 R62.2
SPI_MOSI: DD1.23 XP11.3
SPI_SCK: DD1.21 XP11.1
SWCLK: DD1.49 XP10.2
SWDIO: DD1.46 XP10.3
SYNC: C8.2 DA2.1 DD1.14 R7.1
TX1: DD1.42 XP3.2
TX2: DA11.2 DD1.16 XP4.2
TX3: DD1.29
US: R11.1 TV1.20
USB+: DD2.3 X1.3
USB-: DD2.4 X1.2
VDIN: DD2.10 DD2.13 DD2.14 DD2.15 DD2.20 DD2.21
pads on no net: DA10.3 DA11.3 DD1.5 DD1.6 DD1.8 DD1.9 DD1.10 DD1.36 DD1.41 DD1.50 DD1.54 DD1.56 DD1.57 DD1.61 DD1.62 DD2.1 DD2.11 DD2.12 DD2.16 DD2.17 DD2.18 DD2.19 DD2.22 DD2.23 DD2.26 DD2.27 DD2.28 SB1.3 SB1.4 TV1.3 TV1.5 TV1.8 TV1.10 TV1.15 TV1.M3

## Polygon pours and split planes (outlines as drawn)
GND1 on Top Layer "Keep-Out Layer-No Net" (solid, remove dead copper, pour order 6): -33.806,-96.582 -33.806,-72.882 -39.606,-72.882 -44.506,-67.982 -57.806,-67.982 -63.506,-73.682 -63.506,-78.882 -65.906,-81.282 -65.906,-96.582
GND1 on Bottom Layer "Keep-Out Layer-No Net" (solid, remove dead copper, pour order 8): -33.806,-96.582 -33.806,-73.282 -33.306,-72.782 -39.606,-72.782 -39.706,-72.682 -44.306,-68.082 -45.306,-68.082 -57.906,-68.082 -63.506,-73.682 -63.506,-78.882 -65.906,-81.282 -65.906,-96.582

## Other copper
Top Layer:
  pour cut-out: -12.107,19.293 -2.306,19.293 -2.306,17.018 -12.107,17.018
  pour cut-out: -13.531,32.893 -2.131,32.893 -2.131,30.618 -13.531,30.618
  pour cut-out: 33.994,-67.582 33.994,-40.582 20.294,-40.582 20.294,-64.482 20.694,-64.882 23.694,-64.882 23.694,-67.582
  pour cut-out: -12.462,-31.637 -12.462,-34.137 -12.762,-34.137 -12.662,-34.037 -12.662,-31.437
  text "SB1" at 32.719,31.093 h3
  text "СЕТЬ" at 23.319,-43.082 h3
  text "ГОТОВ" at 21.369,-47.082 h3
  text "ТОК" at 24.369,-50.557 h3
  text "ВКЛ" at 24.419,-54.557 h3
  text "МТЗ" at 24.544,-58.532 h3
  text "ОБРЫВ" at 21.494,-62.482 h3
  text "ООП" at 24.219,-66.582 h3
  text "ОБЩ" at -7.756,-86.882 h2.5

## Silkscreen, mask and mechanical layers (free items; w line width, h text height)
Top Overlay:
  drawing of 860 lines, arcs and shapes, not listed
  text "KMT1-42.CPU REV1.0.1" at -73.006,35.118 h3
  text "КМТ-КП" at 9.044,30.968 h3
  text "U" at -8.406,30.918 h3
  text "2" at -3.306,30.918 h3
  text "220" at -13.006,30.868 h3
  text "380B" at -27.306,26.293 h3
  text "ПИТАНИЕ" at -29.581,21.893 h3
  text "TO, 25A" at -61.006,18.218 h3 r90
  text "110" at -11.754,17.211 h3
  text "i" at -7.954,17.211 h3
  text "1" at -3.154,17.211 h3
  text "220B" at -27.031,17.118 h3
  text "ОБЩ" at -7.756,-86.807 h2.5
  text "ВХ1" at 14.194,-86.932 h2.5
  text "ВКЛ" at 17.969,-86.932 h2.5
  text "ОТКР" at 3.494,-86.957 h2.5
  text "+24В" at 22.069,-86.957 h2.5
  text "ГОТОВ" at -3.181,-87.007 h2.5
  text "-24В" at 8.444,-87.182 h2.5
Top Solder:
  circle w0.4: c-5.854,17.911 r0.05
  circle w0.4: c-5.054,17.911 r0.05
  circle w0.4: c-5.256,31.618 r0.05
  circle w0.4: c-4.206,31.618 r0.05
  pour cut-out: -60.406,28.518 -60.406,17.73 -63.414,17.73 -63.414,28.518
  pour cut-out: -69.087,32.746 -69.067,32.748 -69.056,32.739 -69.042,32.738 -69.029,32.722 -69.01,32.714 -69.003,32.695 -68.987,32.682 -63.487,22.432 -63.484,22.399 -63.471,22.368 -63.479,22.35 -63.477,22.329 -63.498,22.303 -63.51,22.273 -63.529,22.265 -63.542,22.249 -63.575,22.246 -63.606,22.233 -74.606,22.233 -74.637,22.246 -74.67,22.249 -74.683,22.265 -74.702,22.273 -74.715,22.303 -74.736,22.329 -74.734,22.35 -74.741,22.368 -74.729,22.399 -74.725,22.432 -69.225,32.682 -69.21,32.695 -69.202,32.714 -69.183,32.722 -69.17,32.738 -69.156,32.739 -69.145,32.748 -69.125,32.746 -69.106,32.754
  text "SB1" at 32.719,31.093 h3
  text "КМТ-КП" at 9.044,30.968 h3
  text "U" at -8.406,30.918 h3
  text "2" at -3.306,30.918 h3
  text "220" at -13.006,30.868 h3
  text "380B" at -27.306,26.293 h3
  text "ПИТАНИЕ" at -29.581,21.893 h3
  text "TO, 25A" at -61.006,18.218 h3 r90
  text "110" at -11.754,17.211 h3
  text "i" at -7.954,17.211 h3
  text "1" at -3.154,17.211 h3
  text "220B" at -27.031,17.118 h3
  text "СЕТЬ" at 23.319,-43.082 h3
  text "ГОТОВ" at 21.369,-47.082 h3
  text "ТОК" at 24.369,-50.557 h3
  text "ВКЛ" at 24.419,-54.557 h3
  text "МТЗ" at 24.544,-58.532 h3
  text "ОБРЫВ" at 21.494,-62.482 h3
  text "ООП" at 24.219,-66.582 h3
  text "KMT1-42.CPU" at -5.931,-73.907 h2.5
  text "WWW.INTMASH.RU" at -8.431,-75.657 h2.5
  text "REV1.0.1 23.08.2021" at -8.856,-77.407 h2.5
  text "NAZAR" at -3.631,-79.207 h2.5
  text "ОБЩ" at -7.756,-86.882 h2.5
  text "ВХ1" at 14.194,-86.932 h2.5
  text "ВКЛ" at 17.969,-86.932 h2.5
  text "ОТКР" at 3.494,-86.957 h2.5
  text "+24В" at 22.069,-86.957 h2.5
  text "ГОТОВ" at -3.181,-87.007 h2.5
  text "-24В" at 8.444,-87.182 h2.5
Mechanical 2:
  pour cut-out: -33.93,32.745 -33.898,32.668 -33.898,12.168 -33.93,12.092 -34.006,12.06 -59.506,12.06 -59.583,12.092 -59.614,12.168 -59.614,32.668 -59.583,32.745 -59.506,32.777 -34.006,32.777
  pour cut-out: -70.369,19.541 -70.36,19.544 -69.735,19.474 -69.727,19.469 -69.718,19.47 -69.112,19.304 -69.105,19.298 -69.096,19.298 -68.523,19.039 -68.516,19.032 -68.508,19.03 -67.982,18.685 -67.977,18.677 -67.969,18.674 -67.503,18.251 -67.5,18.243 -67.492,18.239 -67.098,17.748 -67.096,17.739 -67.089,17.734 -66.777,17.188 -66.775,17.179 -66.769,17.172 -66.546,16.584 -66.546,16.575 -66.541,16.568 -66.413,15.952 -66.414,15.944 -66.411,15.935 -66.38,15.307 -66.383,15.299 -66.38,15.29 -66.447,14.665 -66.452,14.657 -66.451,14.648 -66.615,14.041 -66.62,14.034 -66.62,14.025 -66.877,13.451 -66.884,13.444 -66.885,13.436 -67.229,12.909 -67.236,12.904 -67.239,12.895 -67.66,12.428 -67.668,12.424 -67.673,12.416 -68.162,12.021 -68.17,12.018 -68.176,12.011 -68.72,11.697 -68.729,11.695 -68.736,11.689 -69.323,11.464 -69.332,11.464 -69.339,11.459 -69.954,11.327 -69.963,11.329 -69.971,11.325 -70.599,11.291 -70.608,11.294 -70.616,11.292 -71.242,11.356 -71.25,11.361 -71.259,11.359 -71.867,11.521 -71.874,11.526 -71.883,11.527 -72.458,11.781 -72.464,11.787 -72.473,11.789 -73.002,12.13 -73.007,12.137 -73.015,12.14 -73.484,12.56 -73.488,12.568 -73.496,12.572 -73.894,13.059 -73.896,13.068 -73.903,13.073 -74.22,13.616 -74.221,13.625 -74.227,13.632 -74.456,14.218 -74.456,14.227 -74.461,14.234 -74.595,14.849 -74.593,14.857 -74.597,14.866 -74.633,15.494 -74.631,15.502 -74.633,15.51 -74.571,16.136 -74.567,16.144 -74.568,16.153 -74.409,16.762 -74.404,16.769 -74.404,16.778 -74.152,17.354 -74.146,17.361 -74.144,17.369 -73.805,17.899 -73.798,17.905 -73.795,17.913 -73.378,18.384 -73.37,18.388 -73.366,18.395 -72.88,18.795 -72.872,18.798 -72.866,18.805 -72.324,19.124 -72.315,19.126 -72.309,19.132 -71.724,19.363 -71.715,19.363 -71.708,19.368 -71.094,19.504 -71.085,19.503 -71.077,19.507 -70.763,19.526 -70.762,19.526 -70.692,19.53 -70.691,19.53 -70.377,19.544

## Text inside footprints (layer, text, board x,y; h text height)
VD3: Top Overlay "~" at -69.906,-63.682 h0.8 r180; Top Overlay "~" at -64.706,-63.682 h0.8 r180; Top Overlay "-" at -64.606,-69.382 h0.8 r180; Top Overlay "+" at -69.806,-69.382 h0.8 r180